# Altium PCB 25632-myersd33_02_7459.PcbDoc
Units mil, origin at the board's own origin, x right, y up, seen from the top; angles counter-clockwise.
Board outline 2310.03 x 2910.03 mil, 2 copper layers (Top Layer, Bottom Layer); 22 components, 51 nets, 103 pads, 4 vias.
Unrouted connection lines stored in the file: 3.
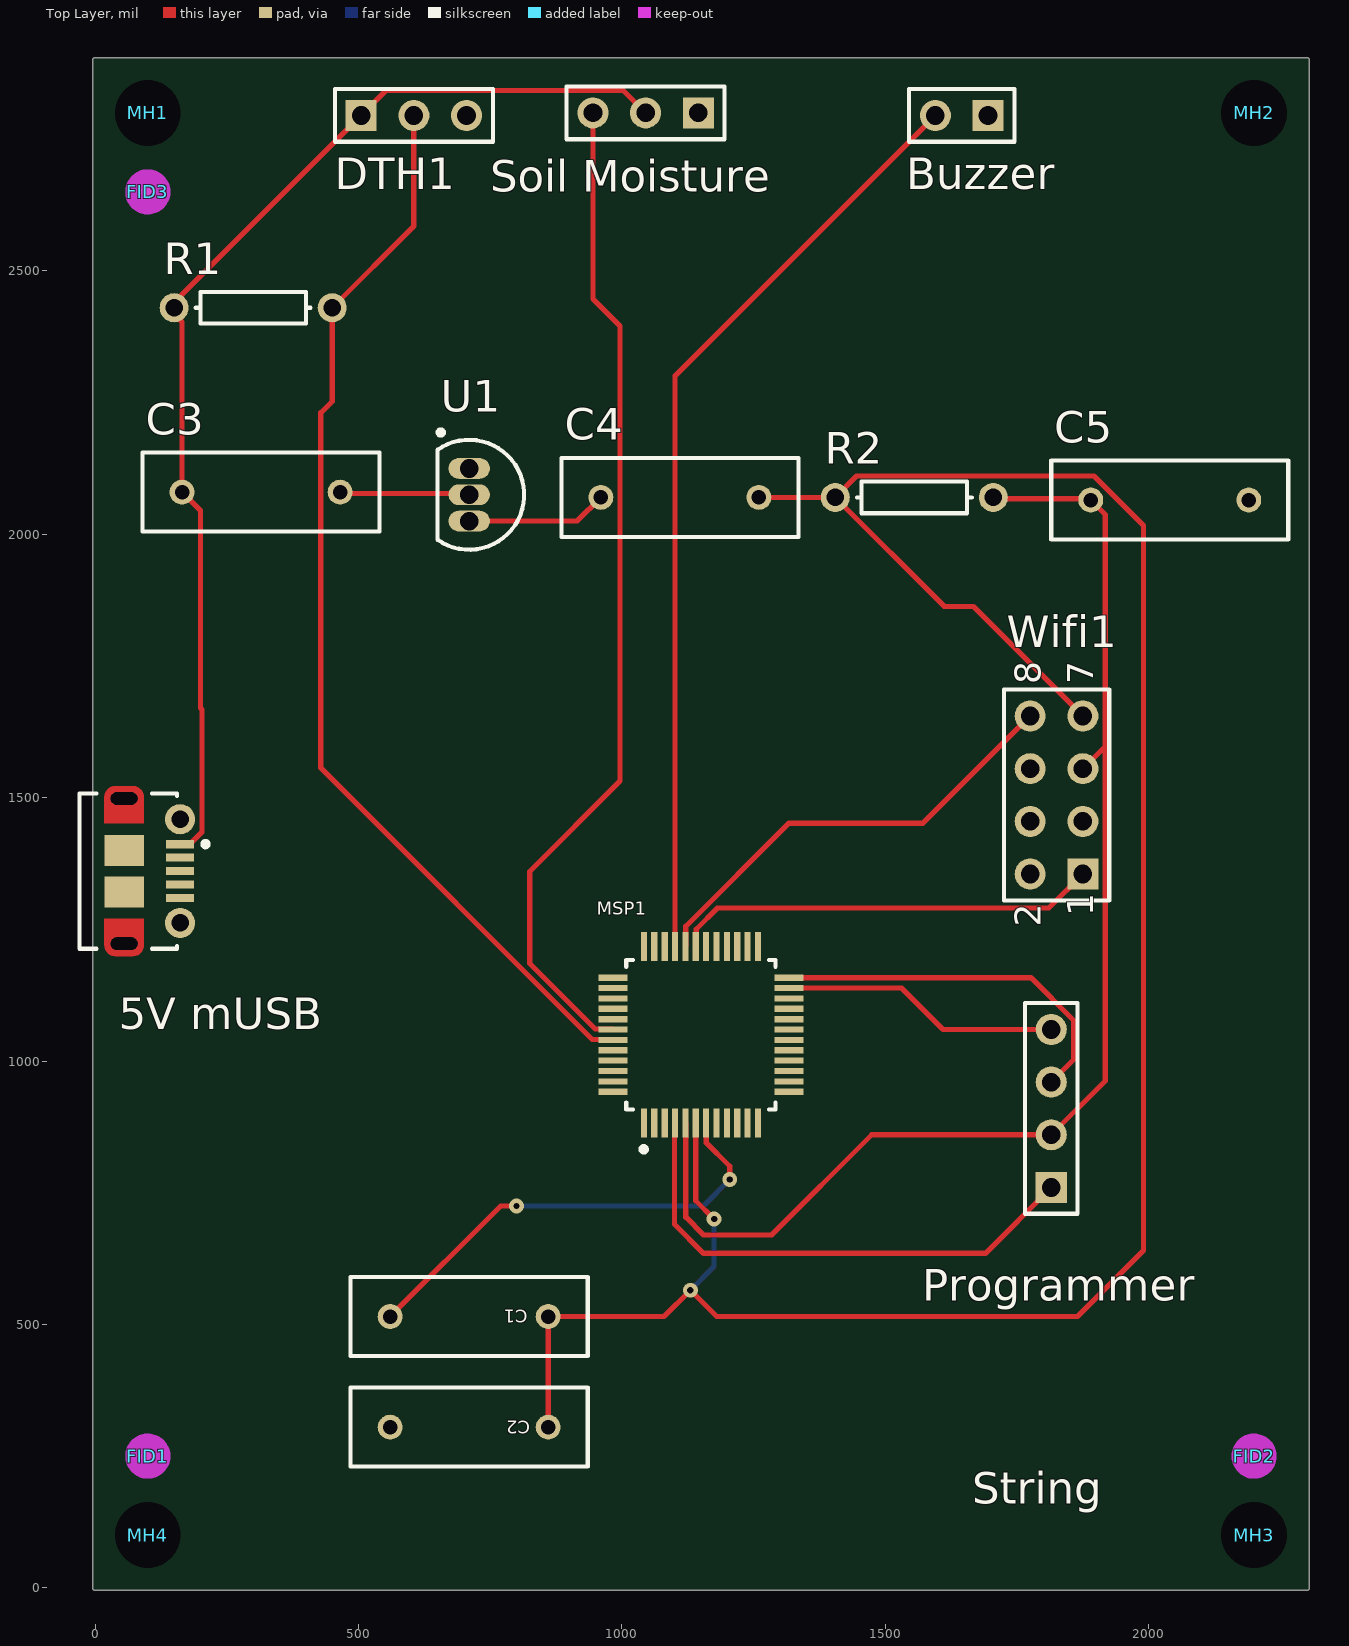
[diagram p0: Top Layer view]
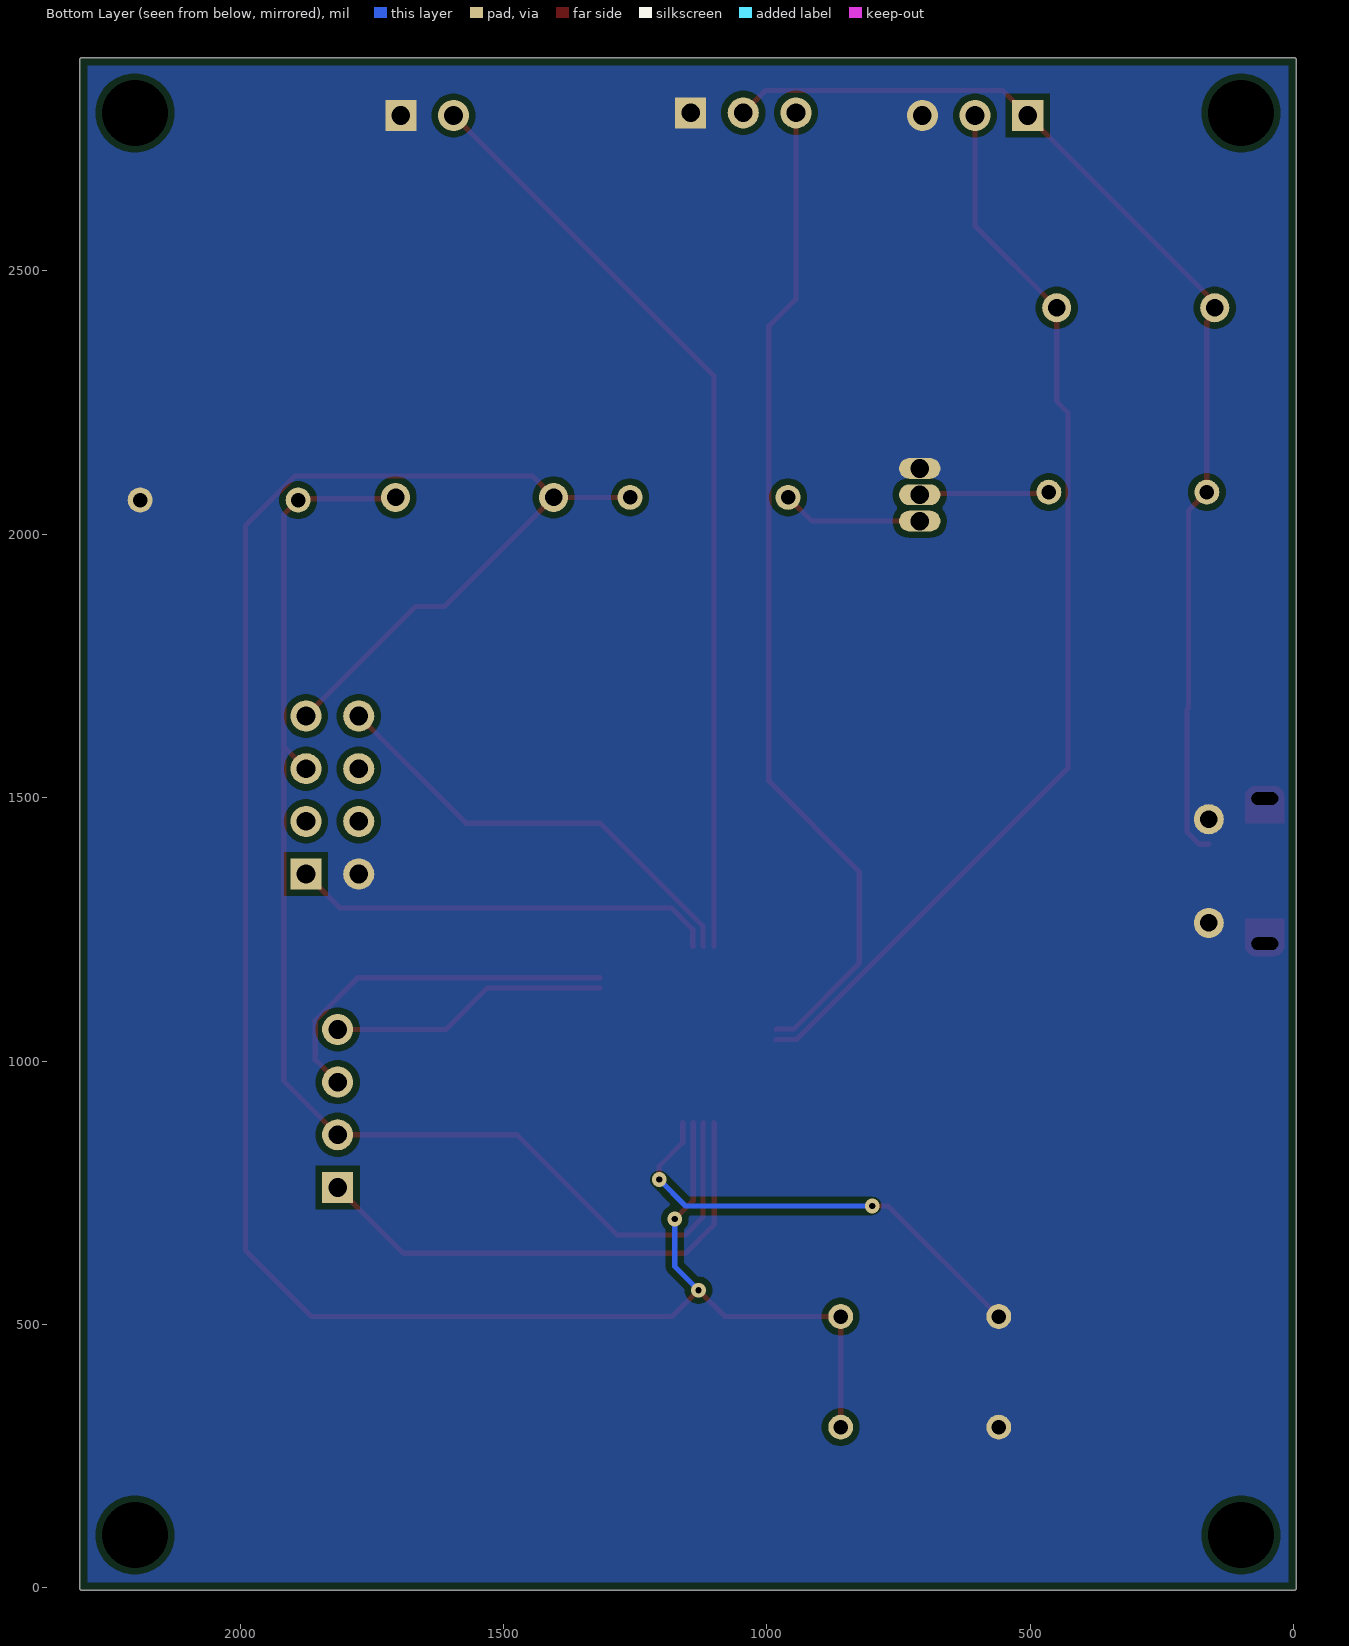
[diagram p1: Bottom Layer view, seen from below]

## Layer stack, top to bottom
Top Solder: solder mask 0.4, Solder Resist, Dk 3.5
Top Layer: signal copper 1.4
Dielectric 1: core 12.6, FR-4, Dk 4.8
Bottom Layer: signal copper 1.4
Bottom Solder: solder mask 0.4, Solder Resist, Dk 3.5

## Board outline
0,-5.01 cw(c0,0) -5.01,0 -5.01,1500 -5.02,1476 -5.01,2900 cw(c0,2900) 0,2905.02 2300,2905.02 cw(c2300,2900) 2305.01,2900 2305.01,1500.03 2305.01,1494.25 2305.01,1500 2305.01,0 cw(c2300,0) 2300,-5.01

## Design rules (kind name [scope] priority, off if disabled: settings)
AcuteAngle [All] p1: minimum=4.50000000000000E+0001 checktracksonly=FALSE
AssemblyTestPointUsage [All] p1: valid=2
BoardOutlineClearance BoardOutlineClearance_MountingHoles [OnCopper and InComponentClass('Mounting Holes')] p1: gap=15 ignorepadtopadclearanceinfootprint=FALSE
BoardOutlineClearance BoardOutlineClearance_Poly [OnCopper and IsPoly] p2: gap=15 ignorepadtopadclearanceinfootprint=FALSE
BoardOutlineClearance [OnCopper and Not InComponentClass('Logo') and not InComponentClass('FiducialMark') and not InRegion(1000,500,4000,800) and not InPoly] p3: gap=10 ignorepadtopadclearanceinfootprint=FALSE
Clearance Clearance_FiducialMark [IsKeepOut and InComponentClass('FiducialMark') vs IsPad and InComponentClass('FiducialMark')] p1: gap=0 ignorepadtopadclearanceinfootprint=FALSE
Clearance "Fiducial Clearance" [InComponentClass('FiducialMark')] p2: gap=10 ignorepadtopadclearanceinfootprint=FALSE except(0: Arc-Hole Track-Hole SMDPad-Hole THPad-Hole Via-Hole Fill-Hole Poly-Hole Region-Hole Text-Hole)
Clearance Clearance_Keepouts [((IsTrack Or IsArc) And Not InPoly) And IsFree and IsKeepOut vs ((IsTrack Or IsArc) And Not InPoly) And IsFree and IsKeepOut] p3: gap=0 ignorepadtopadclearanceinfootprint=FALSE
Clearance Clearance_Poly [InPolygon] p4: gap=12 ignorepadtopadclearanceinfootprint=FALSE except(0: Arc-Hole Track-Hole SMDPad-Hole THPad-Hole Via-Hole Fill-Hole Poly-Hole Region-Hole Text-Hole)
Clearance [All] p5: gap=7.87 ignorepadtopadclearanceinfootprint=FALSE except(0: Arc-Hole Track-Hole SMDPad-Hole THPad-Hole Via-Hole Fill-Hole Poly-Hole Region-Hole Text-Hole)
ComponentClearance ComponentClearance_Standoffs [HasFootprint('KY_MAE-10') vs HasFootprint('NPTH125mil')] p1: gap=0 collisioncheckmode=3 verticalgap=0 showdistances=FALSE
ComponentClearance ComponentClearance_2PinHeaders [HasFootprint('TSW-102-07-G-S') vs HasFootprint('TSW-102-07-G-S')] p2: gap=0 collisioncheckmode=3 verticalgap=0 showdistances=FALSE
ComponentClearance ComponentClearance_TestPoint [HasFootprint('Keystone5001') vs HasFootprint('Keystone5001')] p3: gap=1 collisioncheckmode=3 verticalgap=10 showdistances=FALSE
ComponentClearance ComponentClearance_MountingHoles_FiducialMarks [InComponentClass('Mounting Holes') vs InComponentClass('FiducialMark')] p4: gap=10 collisioncheckmode=3 verticalgap=10 showdistances=FALSE
ComponentClearance ComponentClearance_ShuntToShunt [InComponentClass('Shunt') vs InComponentClass('Shunt')] p5: gap=0 collisioncheckmode=3 verticalgap=0 showdistances=FALSE
ComponentClearance ComponentClearance_Shunt [InComponentClass('Header') vs InComponentClass('Shunt')] p6: gap=0 collisioncheckmode=3 verticalgap=0 showdistances=FALSE
ComponentClearance ComponentClearance_Logo [InComponentClass('Logo')] p7: gap=5 collisioncheckmode=3 verticalgap=10 showdistances=FALSE
ComponentClearance ComponentClearance_ScrewToNut [(HasFootprint('NY PMS 440 0025 PH')) vs (HasFootprint('Keystone_1902C'))] p8: gap=5 collisioncheckmode=3 verticalgap=10 showdistances=FALSE
ComponentClearance ComponentClearance_MountingHoles [InComponentClass('Mounting Holes')] p9: gap=250 collisioncheckmode=3 verticalgap=100000 showdistances=FALSE
ComponentClearance ComponentClearance_SmallPassives [HasFootprint('0201*') or HasFootprint('0402*') or HasFootprint('0508') or HasFootprint('0603*') or HasFootprint('0612') or HasFootprint('0805*') or HasFootprint('0815*') or HasFootprint('0830*') or HasFootprint('1206*') or HasFootprint('1210*') or HasFootprint('1808*') or HasFootprint('1812*') or HasFootprint('1825*') or HasFootprint('2010*') or HasFootprint('2220*') or HasFootprint('2225*') or HasFootprint('2512*') or HasFootprint('2728*') or HasFootprint('3518*') vs HasFootprint('0201*') or HasFootprint('0402*') or HasFootprint('0508') or HasFootprint('0603*') or HasFootprint('0612') or HasFootprint('0805*') or HasFootprint('0815*') or HasFootprint('0830*') or HasFootprint('1206*') or HasFootprint('1210*') or HasFootprint('1808*') or HasFootprint('1812*') or HasFootprint('1825*') or HasFootprint('2010*') or HasFootprint('2220*') or HasFootprint('2225*') or HasFootprint('2512*') or HasFootprint('2728*') or HasFootprint('3518*')] p10: gap=5 collisioncheckmode=3 verticalgap=0 showdistances=FALSE
ComponentClearance ComponentClearance_THtoSMT [IsThruComponent vs IsSMTComponent] p11: gap=10 collisioncheckmode=3 verticalgap=0 showdistances=FALSE
ComponentClearance ComponentClearance_THtoTH [IsThruComponent vs IsThruComponent] p12: gap=15 collisioncheckmode=3 verticalgap=0 showdistances=FALSE
ComponentClearance [All] p13: gap=15 collisioncheckmode=3 verticalgap=0 showdistances=FALSE
DiffPairsRouting [All] p1: maxlimit=100 minlimit=10 mostfreqgap=10 toplayer_minwidth=15 toplayer_maxwidth=15 toplayer_prefwidth=15 bottomlayer_minwidth=15 bottomlayer_maxwidth=15 bottomlayer_prefwidth=15 maxuncoupledlength=1000
FabricationTestPointUsage TestPointUsage [All] p1: valid=2 allowmultiple=FALSE
FabricationTestpoint Testpoint [All] p1: side=3 testpointundercomponent=TRUE minsize=40 maxsize=100 preferedsize=60 minholesize=0 maxholesize=40 preferedholesize=32 testpointgrid=1 allowsidetop=TRUE allowsidebottom=TRUE usegrid=TRUE gridtolerance=0.01
FanoutControl Fanout_LCC [IsLCC] p1: bgadir=Out bgaviamode=Centered fanoutstyle=Auto fanoutdirection=Alternating viagrid=1 // Fanout_LCC (Default Rule)
FanoutControl Fanout_BGA [IsBGA] p2: bgadir=Out bgaviamode=Centered fanoutstyle=Auto fanoutdirection=Alternating viagrid=1 // Fanout_BGA (Default Rule)
FanoutControl Fanout_Default [All] p4: bgadir=Out bgaviamode=Centered fanoutstyle=Auto fanoutdirection=Alternating viagrid=1 // Fanout_Default (Default Rule)
FanoutControl Fanout_Small [(CompPinCount < 5)] p5: bgadir=Out bgaviamode=Centered fanoutstyle=Auto fanoutdirection=OutThenIn viagrid=1 // Fanout_Small (Default Rule)
HoleSize [All] p1: absolutevalues=TRUE maxlimit=251 minlimit=12 maxpercent=80.000 minpercent=20.000
MinimumAnnularRing MinimumAnnularRing_ThermalPadVias [IsVia and InAnyComponent] p1: minimumring=5.91
MinimumAnnularRing [All] p2: minimumring=8
MinimumSolderMaskSliver [All] p1: minsoldermaskwidth=3.94
PlaneClearance [All] p1: clearance=10
PlaneConnect [All] p1: planeconnectstyle=Relief reliefexpansion=10 reliefentries=4 reliefconductorwidth=10 reliefairgap=10
PolygonConnect [All] p1: connectstyle=Direct reliefconductorwidth=10 reliefentries=4 polygonreliefangle="90 Angle" airgapwidth=10
RoomDefinition NewFinalProj [InComponentClass('NewFinalProj')] p1: confinementstyle=ConfineIn formatcopy=TRUE lockcomponents=FALSE outline -295,-305 2570,-305 2570,3035 -295,3035
RoutingVias ThermalPadVias [IsVia and InAnyComponent] p1: holewidth=7.87 width=19.68 viastyle="Through Hole" minholewidth=7.87 minwidth=19.68 maxholewidth=16 maxwidth=30
RoutingVias [All] p2: holewidth=12 width=28 viastyle="Through Hole" minholewidth=7.87 minwidth=26 maxholewidth=40 maxwidth=65
SilkToBoardRegionClearance [Not ((IsComment or IsDesignator) And (Hide <> 'False')) and not InRegion(1000,500,4000,800)] p1:
SilkToSilkClearance SilkToSilkClearance_Pb-FreeLogo [(HasFootprint('Pb-Free_Overlay_Medium') OR HasFootprint('Pb-Free_Overlay_Small')) vs (HasFootprint('Pb-Free_Overlay_Medium') OR HasFootprint('Pb-Free_Overlay_Small'))] p1: silktosilkclearance=0
SilkToSilkClearance [All] p2: silktosilkclearance=3
SilkToSolderMaskClearance SilkToComponentPadClearance [(IsPad or IsFill or IsRegion) and InAnycomponent] p1: minsilkscreentomaskgap=3 clearancetoexposedcopper=TRUE
SilkToSolderMaskClearance "Silk to Solder Mask Opening" [All] p2: minsilkscreentomaskgap=3 clearancetoexposedcopper=FALSE
SolderMaskExpansion SolderMaskExpansion_via [isvia] p1: expansion=-17 istentingtop=FALSE
SolderMaskExpansion [All] p2: expansion=1.97 istentingtop=FALSE
Width [All] p1: maxlimit=100 minlimit=6 preferedwidth=10 checkconnectedcopper=TRUE
14 further rules are at their usual default settings.

## Components (designator, comment, footprint, x,y, rotation, side; value= is the part's Value field where it differs from the comment)
"5V mUSB" "105017-0001" USB-MICRO-B_V 108.15,1360.63 r270 top
Buzzer "buzzer" HDR1X2 1695,2795 r180 top
C1 "Cap" RAD-0.3 710,515 r0 top
C2 "Cap" RAD-0.3 710,305 r0 top
C3 "Cap" RAD-0.3 315,2080 r0 top value=1uF
C4 "Cap" RAD-0.3 1110,2070 r0 top value=1uF
C5 "Cap" RAD-0.3 2040,2065 r180 top value=1000pF
DTH1 "Header 3" HDR1X3 505,2795 r0 top
FID1 "Fiducial" Fiducial6.4-20#1 100,250 r0 top
FID2 "Fiducial" Fiducial6.4-20#2 2200,250 r0 top locked
FID3 "Fiducial" Fiducial6.4-20#2 100,2650 r0 top
MH1 "MTG_NoPads" NPTH125mil 100,2800 r0 top locked
MH2 "MTG_NoPads" NPTH125mil 2200,2800 r0 top locked
MH3 "MTG_NoPads" NPTH125mil 2200,100 r0 top locked
MH4 "MTG_NoPads" NPTH125mil 100,100 r0 top locked
MSP1 "MSP430FR2355TPTR" FP-PT0048A-MFG 1150,1050 r90 top locked
Programmer "Header 4" HDR1X4 1815,760 r90 top
R1 "Res1" AXIAL-0.3 300,2430 r180 top value=5K
R2 "Res1" AXIAL-0.3 1555,2070 r180 top value=47.0k
"Soil Moisture" "Header 3" HDR1X3 1145,2800 r180 top
U1 "MCP1700-3302E/TO" TO-92-TO3 710,2075 r180 top
Wifi1 "Header 4X2" HDR2X4 1875,1355 r90 top

## Footprints (in the part's own frame and the unit in brackets; to place one, negate y for a bottom-side part, rotate by r counter-clockwise, add the part's x,y. Pads: shape width x height; smd on the part's side, far side on the other; paste and mask are expansions set on the pad)
AXIAL-0.3 [mm] "Axial Device, Thru-Hole; 2 Leads; 0.3 in Pin Spacing"
  round 1.4 hole 0.85: 1(-3.81,0) 2(3.81,0)
  silkscreen extent -2.77,-0.76 2.77,0.76
Fiducial6.4-20#1 [mil]
  round 25 smd mask+26.87: ""(0,0)
  Top Layer keep-out circle w46.37: c0,0 r19.68
Fiducial6.4-20#2 [mil]
  round 25 smd mask+26.87: 1(0,0)
  Top Layer keep-out circle w46.37: c0,0 r19.68
FP-PT0048A-MFG [mm] "Thin QFP, 48-Leads, Body 7x7mm, Pitch 0.5mm, IPC Medium Density"
  rect 1.4x0.3 smd paste-1000 mask+0: 1(-4.25,2.75) 2(-4.25,2.25) 3(-4.25,1.75) 4(-4.25,1.25) 5(-4.25,0.75) 6(-4.25,0.25) 7(-4.25,-0.25) 8(-4.25,-0.75) 9(-4.25,-1.25) 10(-4.25,-1.75) 11(-4.25,-2.25) 12(-4.25,-2.75) 25(4.25,-2.75) 26(4.25,-2.25) 27(4.25,-1.75) 28(4.25,-1.25) 29(4.25,-0.75) 30(4.25,-0.25) 31(4.25,0.25) 32(4.25,0.75) 33(4.25,1.25) 34(4.25,1.75) 35(4.25,2.25) 36(4.25,2.75)
  rect 0.3x1.4 smd paste-1000 mask+0: 13(-2.75,-4.25) 14(-2.25,-4.25) 15(-1.75,-4.25) 16(-1.25,-4.25) 17(-0.75,-4.25) 18(-0.25,-4.25) 19(0.25,-4.25) 20(0.75,-4.25) 21(1.25,-4.25) 22(1.75,-4.25) 23(2.25,-4.25) 24(2.75,-4.25) 37(2.75,4.25) 38(2.25,4.25) 39(1.75,4.25) 40(1.25,4.25) 41(0.75,4.25) 42(0.25,4.25) 43(-0.25,4.25) 44(-0.75,4.25) 45(-1.25,4.25) 46(-1.75,4.25) 47(-2.25,4.25) 48(-2.75,4.25)
  silkscreen extent -5.65,-3.6 3.6,3.6, body extent -5.05,-5.05 5.05,5.05, height 0.25
HDR1X2 [mm] "Connector; Header; 2 Position"
  rect 1.5x1.5 hole 0.9: 1(0,0)
  round 1.5 hole 0.9: 2(2.54,0)
  silkscreen extent -1.27,-1.27 3.81,1.27
HDR1X3 [mm] "Connector; Header; 3 Position"
  rect 1.5x1.5 hole 0.9: 1(0,0)
  round 1.5 hole 0.9: 2(2.54,0) 3(5.08,0)
  silkscreen extent -1.27,-1.27 6.35,1.27
HDR1X4 [mm] "Connector; Header; 4 Position"
  rect 1.5x1.5 hole 0.9: 1(0,0)
  round 1.5 hole 0.9: 2(2.54,0) 3(5.08,0) 4(7.62,0)
  silkscreen extent -1.27,-1.27 8.89,1.27
HDR2X4 [mm] "Connector; Header; 4x2 Position"
  rect 1.5x1.5 hole 0.9: 1(0,0)
  round 1.5 hole 0.9: 2(0,2.54) 3(2.54,0) 4(2.54,2.54) 5(5.08,0) 6(5.08,2.54) 7(7.62,0) 8(7.62,2.54)
  silkscreen extent -1.27,-1.27 8.89,3.81
NPTH125mil [mil]
  round 120 hole 125 unplated mask+15: 1(0,0)
RAD-0.3 [mm] "Radial Cap, Thru-Hole; 2 Leads; 0.3 in Pin Spacing"
  round 1.2 hole 0.7: 1(-3.81,0) 2(3.81,0)
  silkscreen extent -5.71,-1.91 5.71,1.91
TO-92-TO3 [mm] "TO, Flat Index; 3 In-Line, Axial Leads; Body Dia. 4.8mm; Leads 0.56 x 0.53 mm (max)"
  oval 2x1 hole 0.9: 1(0,-1.27) 2(0,0) 3(0,1.27)
  silkscreen extent -2.65,-3.13 1.52,2.65, body extent -2.65,-2.66 1.52,2.66, height 5.33
USB-MICRO-B_V [mm] "USB, MICRO B, Body 7.491x4.695 mm, Pitch 0.65 mm"
  rect 0.4x1.35 smd: 1(-1.3,1.35) 2(-0.65,1.35) 3(0,1.35) 4(0.65,1.35) 5(1.3,1.35)
  round 1.45 hole 0.85: 6(-2.5,1.35) 7(2.5,1.35)
  rrect50% 0x0 hole 0.6 slot 1.3 at 90 deg: 8(-3.5,-1.35) 11(3.5,-1.35)
  rect 1.5x1.9 smd: 9(-1,-1.35) 10(1,-1.35)
  Top Layer circle w0.5: c-3.6,-1.8 r0.25
  Top Layer circle w0.5: c-3.6,-0.9 r0.25
  Top Layer circle w0.5: c3.6,-1.8 r0.25
  Top Layer circle w0.5: c3.6,-0.9 r0.25
  Top Layer region: -3.6,-1.8 -3.6,-0.9 -4.1,-0.9 -4.1,-1.8
  Top Layer region: 3.6,-0.9 3.6,-1.8 4.1,-1.8 4.1,-0.9
  Top Layer region: 2.3,-0.4 2.3,-2.3 3.6,-2.3 3.6,-0.4
  Top Layer region: -2.3,-2.3 -2.3,-0.4 -3.6,-0.4 -3.6,-2.3
  silkscreen extent -3.75,-3.5 3.75,2.7, body extent -4.1,-3.9 4.1,1.5, height 2.67

## Part data
"5V mUSB": library part CMP-2000-05827-1, "Micro-USB B Receptacle, Right Angle, Bottom Mount, Surface Mount, with Solder Tabs, -30 to 85 degC, 5-Pin USB, RoHS, Tape and Reel", Manufacturer=Molex, Package Description="5-Leads USB, Micro B, Body 7.5 x 5 mm, Pitch 0.65 mm", Package Reference=MICRO-B, Package Version="Rev. F, 12/2012", Standard Package=1, Voltage - Max=30V, 3D Model=105017-0001.stp, Catalog Drawings=1050170001, Category=Connectors,Interconnects, Circuits=5, Connector Type=USB-microB, Datasheet URL=http://www.molex.com/elqNow/elqRedir.htm?ref=http://www.molex.com/webdocs/datasheets/pdf/en-us/1050170001_IO_CONNECTORS.pdf, Datasheet Version=03/2016, Family=USB,DVI,HDMIConnectors, Featured Product=Micro-USBConnectorsUSBConnectors, Features=Shielded,SolderRetention, Gender=Receptacle, Ingress Protection=-, Manufacturer URL=http://www.molex.com/, Mating Products=WM17145-ND-CABLEMICROUSBBTOSTDA1.0MWM17147-ND-CABLEMICROUSBBTOSTDA2.0MWM17146-ND-CABLEMICROUSBBTOSTDA1.5M, Mounting Technology=SurfaceMount, Mounting Type=BoardCutout,SurfaceMount,RightAngle, Number of Contacts=5, Online Catalog=Molex-MicroUSB, Other Names=WM1399DKR, Package URL=http://www.molex.com/pdm_docs/sd/1050170001_sd.pdf, Packaging=Digi-Reel®, PCN Assembly/Origin=ResinSupplier21/Oct/2015, RoHS Information=1050170001CertofCompliance, Series=-, Specifications=-
Buzzer: library part "Header 2", "Header, 2-Pin", LatestRevisionDate=17-Jul-2002, LatestRevisionNote="Re-released for DXP Platform.", Publisher="Altium Limited"
C1: library part 1564, "0.1 µF ±5% 50V Ceramic Capacitor X7R 0603 (1608 Metric)", Capacitance="100.0 nF", Manufacturer=YAGEO, Manufacturer Part Number=CC0603JRX7R9BB104, Package="0603 (1608 Metric)", Supplier Part Number 1=311-1779-2-ND, Tolerance="5.0 %", Voltage Rating="50.0 V", Category=Capacitors, Composition=Ceramic, Datasheet=https://www.yageo.com/upload/media/product/productsearch/datasheet/mlcc/UPY-GPHC_X7R_6.3V-to-50V_20.pdf, Name="100.0 nF 50.0 V 5.0 % Ceramic Capacitor", Packaging="Tape & Reel (TR)", Rowan Part Number=1564, Status=Active, Supplier 1=Digi-Key
C2: library part 1572, "10 µF ±20% 16V Ceramic Capacitor X5R 0603 (1608 Metric)", Capacitance="10.0 µF", Manufacturer=YAGEO, Manufacturer Part Number=CC0603MRX5R7BB106, Package="0603 (1608 Metric)", Supplier Part Number 1=311-1822-2-ND, Tolerance="20.0 %", Voltage Rating="16.0 V", Category=Capacitors, Composition=Ceramic, Datasheet=https://www.yageo.com/upload/media/product/productsearch/datasheet/mlcc/UPY-GPHC_X5R_4V-to-50V_26.pdf, Name="10.0 µF 16.0 V 20.0 % Ceramic Capacitor", Packaging="Tape & Reel (TR)", Rowan Part Number=1572, Status=Active, Supplier 1=Digi-Key
C3 C4 C5: "Capacitor", LatestRevisionDate=17-Jul-2002, LatestRevisionNote="Re-released for DXP Platform.", PackageDescription="Radial Cap, Thru-Hole; 2 Leads; 0.3 in Pin Spacing", PackageReference=RAD-0.3, Published=8-Jun-2000, Publisher="Altium Limited"
DTH1 "Soil Moisture": "Header, 3-Pin", LatestRevisionDate=17-Jul-2002, LatestRevisionNote="Re-released for DXP Platform.", Publisher="Altium Limited"
FID1 FID2 FID3: "Fiducial mark.  There is nothing to buy or mount.", Manufacturer=N/A, ClassName=FiducialMark, CompType=Fiducial, LatestRevisionDate=2017-05-31, LatestRevisionNote="Added Alternate PartNumber and Alternate Manufacturer parameters to appropriate components.", MountType=N/A, PackageReference=N/A, PartNumber=N/A, Publisher="Texas Instruments", SymbolCreator=codlsc, SymbolVersion=2009-11-4
MH1 MH2 MH3 MH4: library part "Mounting Hole (non-standard) No Pad", "PCB Mounting Hole, No Pad", Manufacturer=Any, PartNumber=N/A, CompType="Mounting Hole", LatestRevisionDate=2017-01-25, MountType=N/A, PackageReference="Mounting Hole", Publisher="Texas Instruments", SymbolCreator=a0412235, SymbolVersion=2013-12-26
MSP1: library part CMP-04869-000010-1, "IC MCU 16BIT 32KB FRAM 48LQFP", Ambient Temperature Range High=+105°C, Ambient Temperature Range Low=-40°C, Frequency=24MHz, Manufacturer="Texas Instruments", Max Junction Temp=+115°C, Max Supply Voltage=3.6V, Min Supply Voltage=1.8V, Package=PT0048A, Temperature="-40°C to +105°C", Automotive=No, Category=IC, ComponentLink2Description=Datasheet, ComponentLink2URL=http://www.ti.com/lit/ds/symlink/msp430fr2355.pdf, Core Architecture=RISC, Data Bus Width=16bits, Device Class L1="Integrated Circuits (ICs)", Device Class L2="Embedded Processors and Controllers", Device Class L3=Microcontrollers, Digikey Description="IC MCU 16BIT 32KB FRAM 48LQFP", Footprint Url=http://www.ti.com/lit/ds/symlink/tl16c550c.pdf, Height=1.6mm, Interface=I2C,SPI,UART,USART,SCI,IrDA, Ipc Land Pattern Name=QFP50P900X900X160-48, Lead Free=Yes, Manufacturer Part Number=MSP430FR2355TPTR, Memory Size=32KBytes, Memory Type=OTHER, Number Of A/D Converters=1, Number Of Adc Channels=12, Number Of Cores=1, Number Of I2C Channels=2, Number Of I/Os=44, Number Of Spi Channels=4, Number Of Timers/Counters=4, Number Of Uart Channels=2, Octopart=https://octopart.com/msp430fr2355tptr-texas+instruments-92191342, Ram Size=4KBytes, RoHS=TRUE, Standoff Height=0.05mm, Temperature Range High=+105°C, Temperature Range Low=-40°C
Programmer: "Header, 4-Pin", LatestRevisionDate=17-Jul-2002, LatestRevisionNote="Re-released for DXP Platform.", Publisher="Altium Limited"
R1 R2: "Resistor", LatestRevisionDate=17-Jul-2002, LatestRevisionNote="Re-released for DXP Platform.", PackageDescription="Axial Device, Thru-Hole; 2 Leads; 0.3 in Pin Spacing", PackageReference=AXIAL-0.3, Published=8-Jun-2000, Publisher="Altium Limited"
U1: library part CMP-0136-00007-1, "Low Quiescent Current LDO, 3-Pin TO-92, Extended TemperatureBAG", DatasheetVersion="revB, Feb-2007", PackageDescription="3-Lead Plastic Transistor Outline (TO) [TO-92]", PackageReference=TO-92-TO3, PackageVersion="revBB, Aug-2009"
Wifi1: "Header, 4-Pin, Dual row", LatestRevisionDate=17-Jul-2002, LatestRevisionNote="Re-released for DXP Platform.", Publisher="Altium Limited"

## Via types
v1: diameter 28, hole 12, Top Layer to Bottom Layer, 4 vias

## Nets (pads, with @x,y where several pads share a name; then routed paths per layer and width w, separated by ;. In a path a pad name is that pad's centre, name@x,y a point inside that pad or via, vN(x,y) a via of type N, cw(c..) or ccw(c..) an arc to the next point about the centre after c; other vN are vias at no path point)
5V: "5V mUSB.1" "Soil Moisture.2" C3.1 DTH1.1 R1.2 | length 2157.4
  Top Layer w10: 161.3,1411.81 180,1411.81 202.72,1434.53 202.72,1667.28 200,1670 200,2045 C3.1 165,2402.79 150,2417.79 R1.2 150,2440 DTH1.1 552.4,2842.4 1002.6,2842.4 1045,2800
+3V3: C1.2 C2.2 C4.2 MSP1.6 R2.2 Wifi1.7 | length 4587.8
  Top Layer w10: C2.2 C1.2 1080,515 v1(1130,565) 1180,515 1864.53,515 1990,640.47 1990,2016.61 1896.18,2110.43 1445.43,2110.43 R2.2 ; MSP1.6 1140.16,734.84 v1(1175,700) ; C4.2 R2.2 ; Wifi1.7 1667.12,1862.88 1612.12,1862.88 R2.2
  Bottom Layer w10: v1(1130,565) 1175,610 v1(1175,700)
A0_RX: MSP1.32 Wifi1.8 | length 857.8
  Top Layer w10: MSP1.32 1121.38,1218.23 1121.38,1255.81 1317.19,1451.62 1571.62,1451.62 Wifi1.8
A0_TX: MSP1.31 Wifi1.1 | length 810.6
  Top Layer w10: MSP1.31 1141.06,1218.23 1141.06,1250.21 1181.19,1290.34 1810.34,1290.34 Wifi1.1
A1_SEEED: MSP1.2
A4_SEEED: MSP1.34
A5: Buzzer.2 MSP1.33 | length 1782.4
  Top Layer w10: MSP1.33 1100.79,2300.79 Buzzer.2
A8: DTH1.2 MSP1.43 R1.1 | length 2079.8
  Top Layer w10: DTH1.2 605,2585 R1.1 450,2252.09 428.5,2230.59 428.5,1556.22 943.66,1041.06 981.77,1041.06 MSP1.43
A9: "Soil Moisture.3" MSP1.42 | length 1916.9
  Top Layer w10: 945,2800 945,2446.55 996.5,2395.06 996.5,1531.5 825,1360 825,1185 949.25,1060.75 981.77,1060.75 MSP1.42
A10: MSP1.41
A11: MSP1.40
B0_SCL: MSP1.48
B0_SDA: MSP1.1
B1_CLK: MSP1.14
B1_CS: MSP1.15
B1_MISO: MSP1.12
B1_MOSI: MSP1.13
BCL_RXD: MSP1.24 Programmer.3 | length 708.6
  Top Layer w10: MSP1.24 1776.7,1158.27 1857.4,1077.56 1857.4,1002.4 Programmer.3
BCL_TXD: MSP1.23 Programmer.4 | length 530.2
  Top Layer w10: MSP1.23 1531.06,1138.58 1609.64,1060 Programmer.4
GND: "5V mUSB.5" "5V mUSB.6" "5V mUSB.7" "5V mUSB.8" "5V mUSB.9" "5V mUSB.10" "5V mUSB.11" "Soil Moisture.1" Buzzer.1 C1.1 C2.1 C5.1 DTH1.3 MSP1.7 U1.1 Wifi1.2 | length 878.5
  Top Layer w10: C1.1 770,725 v1(800,725) ; MSP1.7 1159.84,845.16 1204.62,800.38 v1(1204.62,775.09)
  Bottom Layer w10: v1(800,725) 1154.53,725 v1(1204.62,775.09)
NetC3_2: C3.2 U1.2 | length 247.1
  Top Layer w10: C3.2 467.5,2077.5 707.5,2077.5 U1.2
NetC4_1: C4.1 U1.3 | length 268.6
  Top Layer w10: U1.3 915,2025 C4.1
OA2+: MSP1.44
OA2-: MSP1.45
OA2O: MSP1.46
OA3O: MSP1.37
P1.0: MSP1.3
P2.0: MSP1.30
P2.1: MSP1.29
P2.2: MSP1.28
P2.3: MSP1.27
P2.4: MSP1.11
P2.5: MSP1.10
P2.6: MSP1.9
P2.7: MSP1.8
P3.0: MSP1.47
P3.4: MSP1.38
P3.6: MSP1.36
P3.7: MSP1.35
P4.0: MSP1.26
P4.1: MSP1.25
P5.4: MSP1.39
P6.0: MSP1.22
P6.1: MSP1.21
P6.2: MSP1.20
P6.3: MSP1.19
P6.4: MSP1.18
P6.5: MSP1.17
P6.6: MSP1.16
R\S\T\: C5.2 MSP1.5 Programmer.2 R2.1 Wifi1.5 | length 2471.5
  Top Layer w10: MSP1.5 1121.38,881.77 1121.38,703.62 1155,670 1284.2,670 1474.2,860 Programmer.2 1917.4,962.4 1917.4,1597.4 ; R2.1 1707.5,2067.5 1887.5,2067.5 C5.2 1917.4,2037.6 1917.4,1597.4 ; Wifi1.5 1917.4,1597.4
SBWTCK: MSP1.4 Programmer.1 | length 982.7
  Top Layer w10: MSP1.4 1099.88,881.77 1099.88,855.38 1099.88,690.12 1155,635 1690,635 Programmer.1
pads on no net: "5V mUSB.2" "5V mUSB.3" "5V mUSB.4" FID1. FID2.1 FID3.1 MH1.1 MH2.1 MH3.1 MH4.1 Wifi1.3 Wifi1.4 Wifi1.6

## Polygon pours and split planes (outlines as drawn)
GND on Bottom Layer "BOTTOM_LAYER_GND_P000" (solid, pour order 0): 0,2900 2300,2900 2300,0 0,0

## Silkscreen, mask and mechanical layers (free items; w line width, h text height)
Top Overlay:
  text "String" at 1665,159.99 h60
M1 Board Outline:
  lines w10: 0,0 0,2900 2300,2900 2300,0 0,0
M9 Title Sheet:
  lines w10: -541.5,-358.5 -341.5,-358.5 ; -541.5,2016.5 -341.5,2016.5 ; -541.5,4391.5 -341.5,4391.5 ; 1958.5,-2733.5 1958.5,-2533.5 ; 1958.5,6566.5 1958.5,6766.5 ; 4458.5,-2733.5 4458.5,-2533.5 ; 4458.5,6566.5 4458.5,6766.5 ; 6958.5,-2733.5 6958.5,-2533.5 ; 6958.5,6566.5 6958.5,6766.5 ; 9458.5,-2733.5 9458.5,-2533.5 ; 9458.5,6566.5 9458.5,6766.5 ; 11253.5,-2533.5 11253.5,-1923.5 ; 11253.5,-2223.5 14253.5,-2223.5 ; 11253.5,-1623.5 14253.5,-1623.5 ; 11253.5,-1029.5 11253.5,-1323.5 ; 11254.5,-1029.5 14254.5,-1029.5 ; 11958.5,-2733.5 11958.5,-2533.5 ; 11958.5,6566.5 11958.5,6766.5 ; 12758.5,-2523.5 12758.5,-1923.5 ; 14253.5,-1923.5 11253.5,-1923.5 ; 14253.5,-1323.5 11253.5,-1323.5 ; 14258.5,-1333.5 14258.5,-2533.5 ; 14258.5,-358.5 14458.5,-358.5 ; 14258.5,2016.5 14458.5,2016.5 ; 14258.5,4391.5 14458.5,4391.5 ; 11253.5,-1923.5 11253.5,-1323.5 ; 14258.5,-2533.5 -341.5,-2533.5 -341.5,6566.5 14258.5,6566.5 14258.5,-2533.5 ; -541.5,-2733.5 14458.5,-2733.5 14458.5,6766.5 -541.5,6766.5 -541.5,-2733.5
  text "1" at 689.84,6636.5 h70
  text "2" at 3185.5,6636.5 h70
  text "3" at 5674.84,6636.5 h70
  text "4" at 8181.51,6636.5 h70
  text "5" at 10680.5,6636.5 h70
  text "6" at 13185.5,6636.5 h70
  text "A" at -466.5,5493.5 h70
  text "A" at 14333.5,5493.5 h70
  text "B" at -466.5,3113.5 h70
  text "B" at 14333.5,3113.5 h70
  text "C" at -466.5,738.5 h70
  text "C" at 14333.5,738.5 h70
  text "PROJECT TITLE:" at 11293.5,-1122.5 h45
  text "TITLE HERE" at 11343.5,-1255.83 h70
  text "ROWAN USERNAME:" at 11293.5,-1423.5 h45
  text "USERNAME HERE" at 11343.5,-1563.5 h70
  text "D" at -466.5,-1631.5 h70
  text "D" at 14333.5,-1631.5 h70
  text "FILE NAME:" at 11293.5,-1723.5 h45
  text ".PCB_File_Name_No_Path" at 11343.5,-1843.5 h70
  text "ENGINEER:" at 11293.5,-2013.5 h45
  text "REVISION:" at 12798.5,-2013.5 h45
  text "Logan Greif" at 11343.5,-2168.49 h70
  text ".VersionControl_RevNumberShort" at 12849,-2168.49 h70
  text "ALTIUM DESIGNER VERSION:" at 12798.5,-2323.5 h45
  text ".print_Scale" at 11343.5,-2456.83 h70
  text ".Application_BuildNumber" at 12849,-2456.83 h70
  text "1" at 689.84,-2663.5 h70
  text "2" at 3185.5,-2663.5 h70
  text "3" at 5674.84,-2663.5 h70
  text "4" at 8181.51,-2663.5 h70
  text "5" at 10680.5,-2663.5 h70
  text "6" at 13185.5,-2663.5 h70
M12 Stackup:
  drawing of 191 lines, arcs and shapes, not listed
  text "Layer" at 6092.5,4112.5 h60
  text "Name" at 6502.41,4112.5 h60
  text "Material" at 7432.16,4112.5 h60
  text "Thickness" at 8291.92,4112.5 h60
  text "Constant" at 8941.76,4112.5 h60
  text "Board Layer Stack" at 9511.62,4112.5 h60
  text "Top Overlay" at 6502.41,3992.5 h60
  text "Top Solder" at 6502.41,3872.5 h60
  text "Solder Resist" at 7432.16,3872.5 h60
  text "0.40mil" at 8291.92,3872.5 h60
  text "3.5" at 8941.76,3872.5 h60
  text "1" at 6092.5,3752.5 h60
  text "Top Layer" at 6502.41,3752.5 h60
  text "1.40mil" at 8291.92,3752.5 h60
  text "Dielectric 1" at 6502.41,3632.5 h60
  text "FR-4" at 7432.16,3632.5 h60
  text "12.60mil" at 8291.92,3632.5 h60
  text "4.8" at 8941.76,3632.5 h60
  text "2" at 6092.5,3512.5 h60
  text "Bottom Layer" at 6502.41,3512.5 h60
  text "1.40mil" at 8291.92,3512.5 h60
  text "Bottom Solder" at 6502.41,3392.5 h60
  text "Solder Resist" at 7432.16,3392.5 h60
  text "0.40mil" at 8291.92,3392.5 h60
  text "3.5" at 8941.76,3392.5 h60
  text "Bottom Overlay" at 6502.41,3272.5 h60
Drill Drawing:
  circle w10: c6103.71,2157.36 r27.62
  lines w10: 6076.09,1936.36 6131.34,1936.36 6103.71,1881.11 6076.09,1936.36 ; 6076.09,2005.42 6131.34,2005.42 6131.34,2060.67 6076.09,2060.67 6076.09,2005.42 ; 6076.09,2267.86 6089.9,2267.86 6103.71,2254.04 6117.52,2267.86 6131.34,2267.86 6117.52,2281.67 6131.34,2295.48 6117.52,2295.48 6103.71,2309.29 6089.9,2295.48 6076.09,2295.48 6089.9,2281.67 6076.09,2267.86 ; 6076.09,2378.36 6103.71,2392.17 6131.34,2378.36 6117.52,2405.98 6131.34,2433.61 6103.71,2419.79 6076.09,2433.61 6089.9,2405.98 6076.09,2378.36 ; 6076.09,2516.48 6089.9,2516.48 6089.9,2502.67 6117.52,2502.67 6117.52,2516.48 6131.34,2516.48 6131.34,2544.11 6117.52,2544.11 6117.52,2557.92 6089.9,2557.92 6089.9,2544.11 6076.09,2544.11 6076.09,2516.48
  lines w12: 6026,1843.81 9819.79,1843.81 ; 6026,2589.69 9819.79,2589.69 ; 6363.83,1719.5 6363.83,2714 ; 6695.95,1719.5 6695.95,2714 ; 7332.59,1719.5 7332.59,2714 ; 7591.72,1719.5 7591.72,2714 ; 7966.95,1719.5 7966.95,2714 ; 8691.45,1719.5 8691.45,2714 ; 9220.67,1719.5 9220.67,2714 ; 6026,1719.5 9819.79,1719.5 9819.79,2714 6026,2714 6026,1719.5
  text "Symbol" at 6100.59,2626.98 h72
  text "Quantity" at 6401.12,2626.98 h72
  text "Finished Hole Size" at 6733.24,2626.98 h72
  text "Plated" at 7369.88,2626.98 h72
  text "Hole Type" at 7629.01,2626.98 h72
  text "Drill Layer Pair" at 8004.24,2626.98 h72
  text "Hole Tolerance" at 8728.74,2626.98 h72
  text "Hole Length" at 9257.97,2626.98 h72
  text "4" at 6401.12,2502.67 h60
  text "125.00mil (3.175mm)" at 6733.24,2502.67 h60
  text "NPTH" at 7369.88,2502.67 h60
  text "Round" at 7629.01,2502.67 h60
  text "Top Layer - Bottom Layer" at 8004.24,2502.67 h60
  text "-" at 9257.97,2502.67 h60
  text "4" at 6401.12,2378.36 h60
  text "12.00mil (0.305mm)" at 6733.24,2378.36 h60
  text "PTH" at 7369.88,2378.36 h60
  text "Round" at 7629.01,2378.36 h60
  text "Top Layer - Bottom Layer" at 8004.24,2378.36 h60
  text "-" at 9257.97,2378.36 h60
  text "10" at 6401.12,2254.04 h60
  text "27.56mil (0.700mm)" at 6733.24,2254.04 h60
  text "PTH" at 7369.88,2254.04 h60
  text "Round" at 7629.01,2254.04 h60
  text "Top Layer - Bottom Layer" at 8004.24,2254.04 h60
  text "-" at 9257.97,2254.04 h60
  text "6" at 6401.12,2129.73 h60
  text "33.47mil (0.850mm)" at 6733.24,2129.73 h60
  text "PTH" at 7369.88,2129.73 h60
  text "Round" at 7629.01,2129.73 h60
  text "Top Layer - Bottom Layer" at 8004.24,2129.73 h60
  text "-" at 9257.97,2129.73 h60
  text "23" at 6401.12,2005.42 h60
  text "35.43mil (0.900mm)" at 6733.24,2005.42 h60
  text "PTH" at 7369.88,2005.42 h60
  text "Round" at 7629.01,2005.42 h60
  text "Top Layer - Bottom Layer" at 8004.24,2005.42 h60
  text "-" at 9257.97,2005.42 h60
  text "2" at 6401.12,1881.11 h60
  text "23.62mil (0.600mm)" at 6733.24,1881.11 h60
  text "PTH" at 7369.88,1881.11 h60
  text "Slot" at 7629.01,1881.11 h60
  text "Top Layer - Bottom Layer" at 8004.24,1881.11 h60
  text "51.18mil (1.300mm)" at 9257.97,1881.11 h60
  text "49 Total" at 6401.12,1756.79 h60
  text "Slot definitions :" at 6100.59,1669.78 h60
  text "Routed Path Length" at 6551.32,1669.78 h60
  text "= Calculated from tool start centre position to tool end centre position." at 7091.22,1669.78 h60
  text "Hole Length" at 6551.32,1620.05 h60
  text "= Routed Path Length + Tool Size = Slot length as defined in the PCB layout" at 6891.35,1620.05 h60
M17 Embedded Cavity:
  text ".Layer_Name" at 527,-2258.49 h60
M18 Embedded Assembly:
  text ".Layer_Name" at 527,-2258.49 h60
M19 Embedded Keepout:
  text ".Layer_Name" at 527,-2258.49 h60

## Dimensions
100,2800 to 100,100 on Bottom Layer
2200,100 to 100,100 on Bottom Layer
0,0 to 0,2900 on M2 Board Dimensions
0,0 to 2300,0 on M2 Board Dimensions

## Text inside footprints (layer, text, board x,y; h text height)
"5V mUSB": M1 Board Outline "PCB EDGE" at -6.02,1644.09 h11.81 r270
Wifi1: Top Overlay "2" at 1795,1255 h50 r90; Top Overlay "1" at 1895,1275 h50 r90; Top Overlay "7" at 1895,1715 h50 r90; Top Overlay "8" at 1795,1715 h50 r90